# EAGLE board 77seg_panel (EAGLE 6.2)
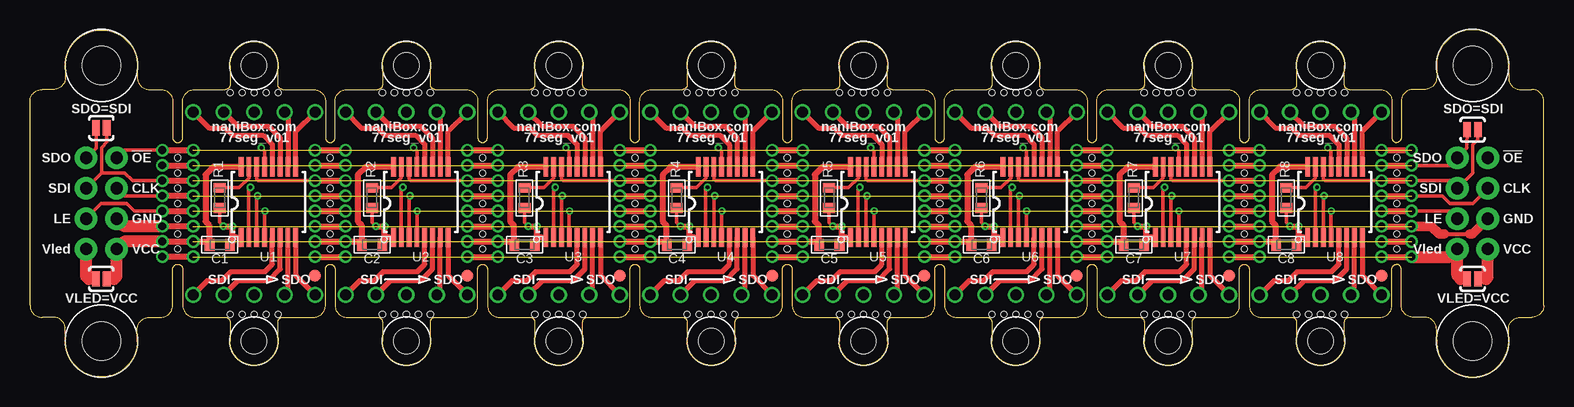
[diagram p0: board, top side]
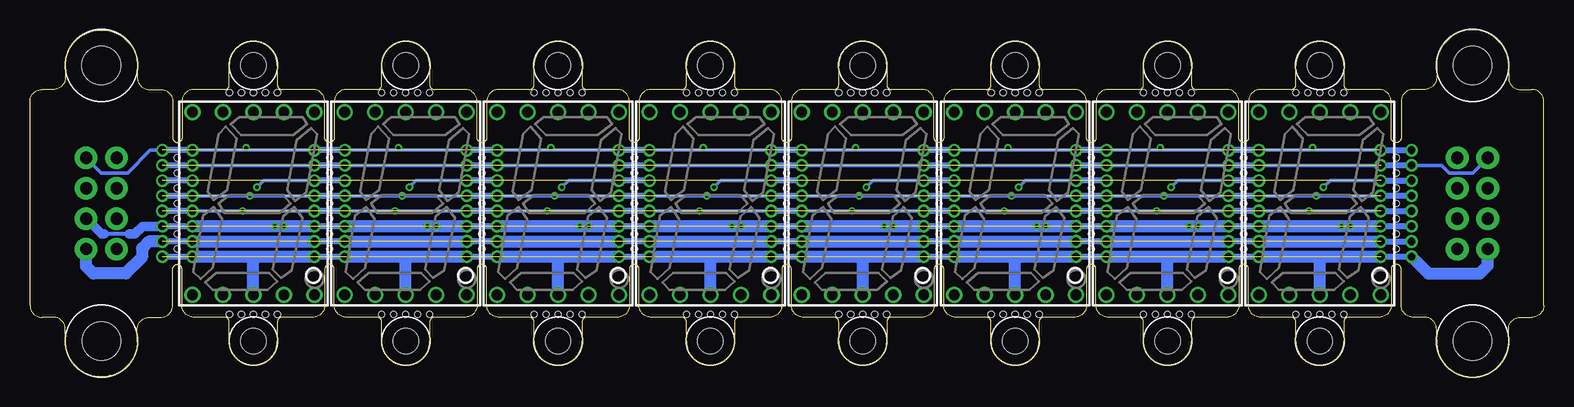
[diagram p1: board, bottom side, seen from below]

Size 126.2 x 28.95 mm. Coordinates in mm from the lower left corner, seen from the top.
Outline: 8.95,2.93 8.95,3.98 arc-90 9.95,4.98 10.9,4.98 arc90 11.9,5.98 11.9,9 arc-90 12.3,9.4
Outline: 2.95,3.08 2.95,3.98 arc90 1.95,4.98 1,4.98 arc-90 0,5.98 0,22.98 arc-90 1,23.98 1.95,23.98 arc90 2.95,24.98 2.95,26.03 arc-177 8.95,26.03 8.95,24.98 arc90 9.95,23.98 10.9,23.98 arc-90 11.9,22.98 11.9,19.96 arc90 12.3,19.55
Outline: 8.95,3.08 arc-180 2.95,2.93
Outline: 117.25,2.93 117.25,3.98 arc90 116.25,4.98 115.3,4.98 arc-90 114.3,5.98 114.3,9 arc90 113.9,9.4
Outline: 123.25,3.08 123.25,3.98 arc-90 124.25,4.98 125.2,4.98 arc90 126.2,5.98 126.2,22.98 arc90 125.2,23.98 124.25,23.98 arc-90 123.25,24.98 123.25,26.03 arc177 117.25,26.03 117.25,24.98 arc-90 116.25,23.98 115.3,23.98 arc90 114.3,22.98 114.3,19.96 arc-90 113.9,19.55
Outline: 117.25,3.08 arc180 123.25,2.93
Outline: 12.33,19.55 arc90 12.73,19.96 12.73,22.98 arc-90 13.73,23.98 16.28,23.98 arc90 16.68,24.38 16.68,25.98 arc-180 20.68,25.98 20.68,24.38 arc90 21.08,23.98 23.63,23.98 arc-90 24.63,22.98 24.63,19.96 arc90 25.03,19.55 arc90 25.43,19.96 25.43,22.98 arc-90 26.43,23.98 28.98,23.98 arc90 29.38,24.38 29.38,25.98 arc-180 33.38,25.98 33.38,24.38 arc90 33.78,23.98 36.33,23.98 arc-90 37.33,22.98 37.33,19.96 arc90 37.73,19.55 arc90 38.13,19.96 38.13,22.98 arc-90 39.13,23.98 41.68,23.98 arc90 42.08,24.38 42.08,25.98 arc-180 46.08,25.98 46.08,24.38 arc90 46.48,23.98 49.03,23.98 arc-90 50.03,22.98 50.03,19.96 arc90 50.43,19.55 arc90 50.83,19.96 50.83,22.98 arc-90 51.83,23.98 54.38,23.98 arc90 54.78,24.38 54.78,25.98 arc-180 58.78,25.98 58.78,24.38 arc90 59.18,23.98 61.73,23.98 arc-90 62.73,22.98 62.73,19.96 arc90 63.13,19.55 arc90 63.53,19.96 63.53,22.98 arc-90 64.53,23.98 67.08,23.98 arc90 67.48,24.38 67.48,25.98 arc-180 71.48,25.98 71.48,24.38 arc90 71.88,23.98 74.43,23.98 arc-90 75.43,22.98 75.43,19.96 arc90 75.83,19.55 arc90 76.23,19.96 76.23,22.98 arc-90 77.23,23.98 79.78,23.98 arc90 80.18,24.38 80.18,25.98 arc-180 84.18,25.98 84.18,24.38 arc90 84.58,23.98 87.13,23.98 arc-90 88.13,22.98 88.13,19.96 arc90 88.53,19.55 arc90 88.93,19.96 88.93,22.98 arc-90 89.93,23.98 92.48,23.98 arc90 92.88,24.38 92.88,25.98 arc-180 96.88,25.98 96.88,24.38 arc90 97.28,23.98 99.83,23.98 arc-90 100.83,22.98 100.83,19.96 arc90 101.23,19.55 arc90 101.63,19.96 101.63,22.98 arc-90 102.63,23.98 105.18,23.98 arc90 105.58,24.38 105.58,25.98 arc-180 109.58,25.98 109.58,24.38 arc90 109.98,23.98 112.53,23.98 arc-90 113.53,22.98 113.53,19.96 arc90 113.93,19.55
Outline: 12.33,9.4 arc-90 12.73,9 12.73,5.98 arc90 13.73,4.98 16.28,4.98 arc-90 16.68,4.58 16.68,2.98 arc180 20.68,2.98 20.68,4.58 arc-90 21.08,4.98 23.63,4.98 arc90 24.63,5.98 24.63,9 arc-90 25.03,9.4 arc-90 25.43,9 25.43,5.98 arc90 26.43,4.98 28.98,4.98 arc-90 29.38,4.58 29.38,2.98 arc180 33.38,2.98 33.38,4.58 arc-90 33.78,4.98 36.33,4.98 arc90 37.33,5.98 37.33,9 arc-90 37.73,9.4 arc-90 38.13,9 38.13,5.98 arc90 39.13,4.98 41.68,4.98 arc-90 42.08,4.58 42.08,2.98 arc180 46.08,2.98 46.08,4.58 arc-90 46.48,4.98 49.03,4.98 arc90 50.03,5.98 50.03,9 arc-90 50.43,9.4 arc-90 50.83,9 50.83,5.98 arc90 51.83,4.98 54.38,4.98 arc-90 54.78,4.58 54.78,2.98 arc180 58.78,2.98 58.78,4.58 arc-90 59.18,4.98 61.73,4.98 arc90 62.73,5.98 62.73,9 arc-90 63.13,9.4 arc-90 63.53,9 63.53,5.98 arc90 64.53,4.98 67.08,4.98 arc-90 67.48,4.58 67.48,2.98 arc180 71.48,2.98 71.48,4.58 arc-90 71.88,4.98 74.43,4.98 arc90 75.43,5.98 75.43,9 arc-90 75.83,9.4 arc-90 76.23,9 76.23,5.98 arc90 77.23,4.98 79.78,4.98 arc-90 80.18,4.58 80.18,2.98 arc180 84.18,2.98 84.18,4.58 arc-90 84.58,4.98 87.13,4.98 arc90 88.13,5.98 88.13,9 arc-90 88.53,9.4 arc-90 88.93,9 88.93,5.98 arc90 89.93,4.98 92.48,4.98 arc-90 92.88,4.58 92.88,2.98 arc180 96.88,2.98 96.88,4.58 arc-90 97.28,4.98 99.83,4.98 arc90 100.83,5.98 100.83,9 arc-90 101.23,9.4 arc-90 101.63,9 101.63,5.98 arc90 102.63,4.98 105.18,4.98 arc-90 105.58,4.58 105.58,2.98 arc180 109.58,2.98 109.58,4.58 arc-90 109.98,4.98 112.53,4.98 arc90 113.53,5.98 113.53,9 arc-90 113.93,9.4
Copper layers (1*16): Top 0.035mm / dielectric 1.5mm / Bottom 0.035mm
Design rules: minimum track width 0.15mm, minimum drill 0.3mm, track to track 0.15mm, track to pad 0.15mm, pad to pad 0.15mm, via to via 0.15mm, smd to smd 0mil, copper to edge 0.18mm, drill to drill 0.2mm, minimum pad ring 0.2mm, minimum via ring 0.15mm, stop-mask expansion 0.05mm, vias tented up to drill 2.5mm, thermal gap 0.25mm
Holes 0.5 mm at 12.3,15.75 12.3,17.02 12.3,18.29 12.3,14.48 12.3,13.21 12.3,11.94 12.3,10.67 18.68,23.73 19.68,23.73 20.68,23.73 17.68,23.73 16.68,23.73 18.68,5.23 17.68,5.23 16.68,5.23 19.68,5.23 20.68,5.23 25.03,15.75 25.03,17.02 25.03,18.29 25.03,14.48 25.03,13.21 25.03,11.94 25.03,10.67 31.38,23.73 32.38,23.73 33.38,23.73 30.38,23.73 29.38,23.73 31.38,5.23 30.38,5.23 29.38,5.23 32.38,5.23 33.38,5.23 37.73,15.75 37.73,17.02 37.73,18.29 37.73,14.48 37.73,13.21 37.73,11.94 37.73,10.67 44.08,23.73 45.08,23.73 46.08,23.73 43.08,23.73 42.08,23.73 44.08,5.23 43.08,5.23 42.08,5.23 45.08,5.23 46.08,5.23 50.43,15.75 50.43,17.02 50.43,18.29 50.43,14.48 50.43,13.21 50.43,11.94 50.43,10.67 56.78,23.73 57.78,23.73 58.78,23.73 55.78,23.73 54.78,23.73 56.78,5.23 55.78,5.23 54.78,5.23 57.78,5.23 58.78,5.23 63.13,15.75 63.13,17.02 63.13,18.29 63.13,14.48 63.13,13.21 63.13,11.94 63.13,10.67 69.48,23.73 70.48,23.73 71.48,23.73 68.48,23.73 67.48,23.73 69.48,5.23 68.48,5.23 67.48,5.23 70.48,5.23 71.48,5.23 75.83,15.75 75.83,17.02 75.83,18.29 75.83,14.48 75.83,13.21 75.83,11.94 75.83,10.67 82.18,23.73 83.18,23.73 84.18,23.73 81.18,23.73 80.18,23.73 82.18,5.23 81.18,5.23 80.18,5.23 83.18,5.23 84.18,5.23 88.53,15.75 88.53,17.02 88.53,18.29 88.53,14.48 88.53,13.21 88.53,11.94 88.53,10.67 94.88,23.73 95.88,23.73 96.88,23.73 93.88,23.73 92.88,23.73 94.88,5.23 93.88,5.23 92.88,5.23 95.88,5.23 96.88,5.23 101.23,15.75 101.23,17.02 101.23,18.29 101.23,14.48 101.23,13.21 101.23,11.94 101.23,10.67 107.58,23.73 108.58,23.73 109.58,23.73 106.58,23.73 105.58,23.73 107.58,5.23 106.58,5.23 105.58,5.23 108.58,5.23 109.58,5.23 113.93,15.75 113.93,17.02 113.93,18.29 113.93,14.48 113.93,13.21 113.93,11.94 113.93,10.67

## Footprints (pad centres in the part's own frame; a part is rotated, then mirrored left to right if it is on the bottom)
C0603 = smd 0.8 x 1: 1 -0.85,0; 2 0.85,0
1X08_1.27MM_NO1 = drill 0.65 pad 0.9: 1 0,0; 2 1.27,0; 3 2.54,0; 4 3.81,0; 5 5.08,0; 6 6.35,0; 7 7.62,0; 8 8.89,0
1X04_NO1 = drill 1.016 pad 1.88: 1 0,0; 2 2.54,0; 3 5.08,0; 4 7.62,0
FIDUCIAL_1X1.5 = smd 1 x 1: 1 0,0
R0603 = smd 0.8 x 1: 1 -0.85,0; 2 0.85,0
SJ_2S-NO = smd 0.635 x 1.27: 1 -0.45,0; 2 0.45,0
TSSOP16 = smd 0.4 x 1.6: 1 -2.275,-2.85; 2 -1.625,-2.85; 3 -0.975,-2.85; 4 -0.325,-2.85; 5 0.325,-2.85; 6 0.975,-2.85; 7 1.625,-2.85; 8 2.275,-2.85; 9 2.275,3.05; 10 1.625,3.05; 11 0.975,3.05; 12 0.325,3.05; 13 -0.325,3.05; 14 -0.975,3.05; 15 -1.625,3.05; 16 -2.275,3.05
SCREW_M3_REDUCED = hole 3.2: 0,0
7-SEGMENT-DISPLAY = drill 0.9 pad 1.35: 1 -5.08,-7.62; 2 -2.54,-7.62; 3 0,-7.62; 4 2.54,-7.62; 5 5.08,-7.62; 6 5.08,7.62; 7 2.54,7.62; 8 0,7.62; 9 -2.54,7.62; 10 -5.08,7.62
SCREW_M2_NOVIAS = hole 2.1: 0,0

## Placement (x,y rotation side)
C1  1uF  [C0603]  15.83,11.03 0 top
C2  1uF  [C0603]  28.53,11.03 0 top
C3  1uF  [C0603]  41.23,11.03 0 top
C4  1uF  [C0603]  53.93,11.03 0 top
C5  1uF  [C0603]  66.63,11.03 0 top
C6  1uF  [C0603]  79.33,11.03 0 top
C7  1uF  [C0603]  92.03,11.03 0 top
C8  1uF  [C0603]  104.73,11.03 0 top
CON1  [1X08_1.27MM_NO1]  11.03,18.92 270 top
CON2  [1X08_1.27MM_NO1]  115.17,18.92 270 top
CON3  M04NO1  [1X04_NO1]  121.52,18.29 270 top
CON4  M04NO1  [1X04_NO1]  118.98,18.29 270 top
CON5  M04NO1  [1X04_NO1]  7.22,18.29 270 top
CON6  M04NO1  [1X04_NO1]  4.68,18.29 270 top
CON7  [1X08_1.27MM_NO1]  23.76,18.92 270 top
CON8  [1X08_1.27MM_NO1]  13.6,18.92 270 top
CON9  [1X08_1.27MM_NO1]  36.46,18.92 270 top
CON10  [1X08_1.27MM_NO1]  26.3,18.92 270 top
CON11  [1X08_1.27MM_NO1]  49.16,18.92 270 top
CON12  [1X08_1.27MM_NO1]  39,18.92 270 top
CON13  [1X08_1.27MM_NO1]  61.86,18.92 270 top
CON14  [1X08_1.27MM_NO1]  51.7,18.92 270 top
CON15  [1X08_1.27MM_NO1]  74.56,18.92 270 top
CON16  [1X08_1.27MM_NO1]  64.4,18.92 270 top
CON17  [1X08_1.27MM_NO1]  87.26,18.92 270 top
CON18  [1X08_1.27MM_NO1]  77.1,18.92 270 top
CON19  [1X08_1.27MM_NO1]  99.96,18.92 270 top
CON20  [1X08_1.27MM_NO1]  89.8,18.92 270 top
CON21  [1X08_1.27MM_NO1]  112.66,18.92 270 top
CON22  [1X08_1.27MM_NO1]  102.5,18.92 270 top
JP1  FIDUCIAL1X1.5  [FIDUCIAL_1X1.5]  23.76,8.44 0 top
JP2  FIDUCIAL1X1.5  [FIDUCIAL_1X1.5]  36.46,8.44 0 top
JP3  FIDUCIAL1X1.5  [FIDUCIAL_1X1.5]  49.16,8.44 0 top
JP4  FIDUCIAL1X1.5  [FIDUCIAL_1X1.5]  61.86,8.44 0 top
JP5  FIDUCIAL1X1.5  [FIDUCIAL_1X1.5]  74.56,8.44 0 top
JP6  FIDUCIAL1X1.5  [FIDUCIAL_1X1.5]  87.26,8.44 0 top
JP7  FIDUCIAL1X1.5  [FIDUCIAL_1X1.5]  99.96,8.44 0 top
JP8  FIDUCIAL1X1.5  [FIDUCIAL_1X1.5]  112.66,8.44 0 top
R1  tbd  [R0603]  15.81,14.94 270 top
R2  tbd  [R0603]  28.51,14.94 270 top
R3  tbd  [R0603]  41.21,14.94 270 top
R4  tbd  [R0603]  53.91,14.94 270 top
R5  tbd  [R0603]  66.61,14.94 270 top
R6  tbd  [R0603]  79.31,14.94 270 top
R7  tbd  [R0603]  92.01,14.94 270 top
R8  tbd  [R0603]  104.71,14.94 270 top
SDI=SDO1  [SJ_2S-NO]  120.25,20.62 180 top
SDO=SDI  [SJ_2S-NO]  5.95,20.78 180 top
U1  TLC9516TSSOP  [TSSOP16]  19.88,14.48 0 top
U2  TLC9516TSSOP  [TSSOP16]  32.58,14.48 0 top
U3  TLC9516TSSOP  [TSSOP16]  45.28,14.48 0 top
U4  TLC9516TSSOP  [TSSOP16]  57.98,14.48 0 top
U5  TLC9516TSSOP  [TSSOP16]  70.68,14.48 0 top
U6  TLC9516TSSOP  [TSSOP16]  83.38,14.48 0 top
U7  TLC9516TSSOP  [TSSOP16]  96.08,14.48 0 top
U8  TLC9516TSSOP  [TSSOP16]  108.78,14.48 0 top
U$1  SCREW_NOGNDM3_REDUCED  [SCREW_M3_REDUCED]  5.95,2.98 0 top
U$2  SCREW_NOGNDM3_REDUCED  [SCREW_M3_REDUCED]  5.95,25.98 0 top
U$3  SCREW_NOGNDM3_REDUCED  [SCREW_M3_REDUCED]  120.25,2.98 0 top
U$4  SCREW_NOGNDM3_REDUCED  [SCREW_M3_REDUCED]  120.26,25.98 0 top
U$5  7-SEGMENT-DISPLAYPTH  [7-SEGMENT-DISPLAY]  18.68,14.48 0 bottom
U$6  SCREW_NOGND  [SCREW_M2_NOVIAS]  18.68,2.98 0 top
U$7  SCREW_NOGND  [SCREW_M2_NOVIAS]  18.68,25.98 0 top
U$8  7-SEGMENT-DISPLAYPTH  [7-SEGMENT-DISPLAY]  31.38,14.48 0 bottom
U$9  SCREW_NOGND  [SCREW_M2_NOVIAS]  31.38,2.98 0 top
U$10  SCREW_NOGND  [SCREW_M2_NOVIAS]  31.38,25.98 0 top
U$11  7-SEGMENT-DISPLAYPTH  [7-SEGMENT-DISPLAY]  44.08,14.48 0 bottom
U$12  SCREW_NOGND  [SCREW_M2_NOVIAS]  44.08,2.98 0 top
U$13  SCREW_NOGND  [SCREW_M2_NOVIAS]  44.08,25.98 0 top
U$14  7-SEGMENT-DISPLAYPTH  [7-SEGMENT-DISPLAY]  56.78,14.48 0 bottom
U$15  SCREW_NOGND  [SCREW_M2_NOVIAS]  56.78,2.98 0 top
U$16  SCREW_NOGND  [SCREW_M2_NOVIAS]  56.78,25.98 0 top
U$17  7-SEGMENT-DISPLAYPTH  [7-SEGMENT-DISPLAY]  69.48,14.48 0 bottom
U$18  SCREW_NOGND  [SCREW_M2_NOVIAS]  69.48,2.98 0 top
U$19  SCREW_NOGND  [SCREW_M2_NOVIAS]  69.48,25.98 0 top
U$20  7-SEGMENT-DISPLAYPTH  [7-SEGMENT-DISPLAY]  82.18,14.48 0 bottom
U$21  SCREW_NOGND  [SCREW_M2_NOVIAS]  82.18,2.98 0 top
U$22  SCREW_NOGND  [SCREW_M2_NOVIAS]  82.18,25.98 0 top
U$23  7-SEGMENT-DISPLAYPTH  [7-SEGMENT-DISPLAY]  94.88,14.48 0 bottom
U$24  SCREW_NOGND  [SCREW_M2_NOVIAS]  94.88,2.98 0 top
U$25  SCREW_NOGND  [SCREW_M2_NOVIAS]  94.88,25.98 0 top
U$26  7-SEGMENT-DISPLAYPTH  [7-SEGMENT-DISPLAY]  107.58,14.48 0 bottom
U$27  SCREW_NOGND  [SCREW_M2_NOVIAS]  107.58,2.98 0 top
U$28  SCREW_NOGND  [SCREW_M2_NOVIAS]  107.58,25.98 0 top
VLED=VCC  [SJ_2S-NO]  5.95,8.18 180 top
VLED=VCC1  [SJ_2S-NO]  120.25,8.18 180 top

## Library data of the parts
C1-C8 R1-R8 = nanibox_rcl
CON1-CON22 = nanibox_con
JP1-JP8 U1-U8 U$1-U$28 = nanibox
SDI=SDO1 SDO=SDI VLED=VCC VLED=VCC1 = SparkFun

## Nets
!OE: CON1.1 CON2.1 CON3.1 CON5.1
!OE1: CON7.1 CON8.1 U1.13
!OE2: CON9.1 CON10.1 U2.13
!OE3: CON11.1 CON12.1 U3.13
!OE4: CON13.1 CON14.1 U4.13
!OE5: CON15.1 CON16.1 U5.13
!OE6: CON17.1 CON18.1 U6.13
!OE7: CON19.1 CON20.1 U7.13
!OE8: CON21.1 CON22.1 U8.13
CLK: CON1.4 CON2.4 CON3.2 CON5.2
CLK1: CON7.4 CON8.4 U1.3
CLK2: CON9.4 CON10.4 U2.3
CLK3: CON11.4 CON12.4 U3.3
CLK4: CON13.4 CON14.4 U4.3
CLK5: CON15.4 CON16.4 U5.3
CLK6: CON17.4 CON18.4 U6.3
CLK7: CON19.4 CON20.4 U7.3
CLK8: CON21.4 CON22.4 U8.3
GND: CON1.6 CON2.6 CON3.3 CON5.3
GND1: C1.2 CON7.6 CON8.6 R1.2 U1.1
GND2: C2.2 CON9.6 CON10.6 R2.2 U2.1
GND3: C3.2 CON11.6 CON12.6 R3.2 U3.1
GND4: C4.2 CON13.6 CON14.6 R4.2 U4.1
GND5: C5.2 CON15.6 CON16.6 R5.2 U5.1
GND6: C6.2 CON17.6 CON18.6 R6.2 U6.1
GND7: C7.2 CON19.6 CON20.6 R7.2 U7.1
GND8: C8.2 CON21.6 CON22.6 R8.2 U8.1
LE: CON1.5 CON2.5 CON4.3 CON6.3
LE1: CON7.5 CON8.5 U1.4
LE2: CON9.5 CON10.5 U2.4
LE3: CON11.5 CON12.5 U3.4
LE4: CON13.5 CON14.5 U4.4
LE5: CON15.5 CON16.5 U5.4
LE6: CON17.5 CON18.5 U6.4
LE7: CON19.5 CON20.5 U7.4
LE8: CON21.5 CON22.5 U8.4
N$1: U2.10 U$8.9
N$2: U2.9 U$8.10
N$3: U1.10 U$5.9
N$4: U1.9 U$5.10
N$5: U2.11 U$8.7
N$6: U2.12 U$8.6
N$7: U2.6 U$8.4
N$8: U2.7 U$8.2
N$9: U2.8 U$8.1
N$10: U1.11 U$5.7
N$11: U1.12 U$5.6
N$12: U1.6 U$5.4
N$13: U1.7 U$5.2
N$14: U1.8 U$5.1
N$15: U2.5 U$8.5
N$16: U3.10 U$11.9
N$17: U1.5 U$5.5
N$18: U3.9 U$11.10
N$19: U3.11 U$11.7
N$20: U3.12 U$11.6
N$21: U3.6 U$11.4
N$22: U3.7 U$11.2
N$23: U3.8 U$11.1
N$24: U3.5 U$11.5
N$25: U4.10 U$14.9
N$26: U4.9 U$14.10
N$27: U4.11 U$14.7
N$28: U4.12 U$14.6
N$29: U4.6 U$14.4
N$30: U4.7 U$14.2
N$31: U4.8 U$14.1
N$32: U4.5 U$14.5
N$33: U5.10 U$17.9
N$34: U5.9 U$17.10
N$35: U5.11 U$17.7
N$36: U5.12 U$17.6
N$37: U5.6 U$17.4
N$38: U5.7 U$17.2
N$39: U5.8 U$17.1
N$40: U5.5 U$17.5
N$41: U6.10 U$20.9
N$42: U6.9 U$20.10
N$43: U6.11 U$20.7
N$44: U6.12 U$20.6
N$45: U6.6 U$20.4
N$46: U6.7 U$20.2
N$47: U6.8 U$20.1
N$48: U6.5 U$20.5
N$49: U7.10 U$23.9
N$50: U7.9 U$23.10
N$51: U7.11 U$23.7
N$52: U7.12 U$23.6
N$53: U7.6 U$23.4
N$54: U7.7 U$23.2
N$55: U7.8 U$23.1
N$56: U7.5 U$23.5
N$57: U8.10 U$26.9
N$58: U8.9 U$26.10
N$59: U8.11 U$26.7
N$60: U8.12 U$26.6
N$61: U8.6 U$26.4
N$62: U8.7 U$26.2
N$63: U8.8 U$26.1
N$64: U8.5 U$26.5
REXT: R1.1 U1.15
REXT1: R2.1 U2.15
REXT2: R3.1 U3.15
REXT3: R4.1 U4.15
REXT4: R5.1 U5.15
REXT5: R6.1 U6.15
REXT6: R7.1 U7.15
REXT7: R8.1 U8.15
SDI: CON1.3 CON2.3 CON4.2 CON6.2 SDI=SDO1.1 SDO=SDI.1
SDI1: CON8.3 U1.2
SDI2: CON10.3 U2.2
SDI3: CON12.3 U3.2
SDI4: CON14.3 U4.2
SDI5: CON16.3 U5.2
SDI6: CON18.3 U6.2
SDI7: CON20.3 U7.2
SDI8: CON22.3 U8.2
SDO: CON1.2 CON2.2 CON4.1 CON6.1 SDI=SDO1.2 SDO=SDI.2
SDO1: CON7.3 U1.14
SDO2: CON9.3 U2.14
SDO3: CON11.3 U3.14
SDO4: CON13.3 U4.14
SDO5: CON15.3 U5.14
SDO6: CON17.3 U6.14
SDO7: CON19.3 U7.14
SDO8: CON21.3 U8.14
SDRET: CON7.2 CON8.2
SDRET1: CON9.2 CON10.2
SDRET2: CON11.2 CON12.2
SDRET3: CON13.2 CON14.2
SDRET4: CON15.2 CON16.2
SDRET5: CON17.2 CON18.2
SDRET6: CON19.2 CON20.2
SDRET7: CON21.2 CON22.2
VCC: CON1.7 CON2.7 CON3.4 CON5.4 VLED=VCC1.1 VLED=VCC.1
VCC1: C1.1 CON7.7 CON8.7 U1.16
VCC2: C2.1 CON9.7 CON10.7 U2.16
VCC3: C3.1 CON11.7 CON12.7 U3.16
VCC4: C4.1 CON13.7 CON14.7 U4.16
VCC5: C5.1 CON15.7 CON16.7 U5.16
VCC6: C6.1 CON17.7 CON18.7 U6.16
VCC7: C7.1 CON19.7 CON20.7 U7.16
VCC8: C8.1 CON21.7 CON22.7 U8.16
VLED: CON1.8 CON2.8 CON4.4 CON6.4 VLED=VCC1.2 VLED=VCC.2
VLED1: CON7.8 CON8.8 U$5.3
VLED2: CON9.8 CON10.8 U$8.3
VLED3: CON11.8 CON12.8 U$11.3
VLED4: CON13.8 CON14.8 U$14.3
VLED5: CON15.8 CON16.8 U$17.3
VLED6: CON17.8 CON18.8 U$20.3
VLED7: CON19.8 CON20.8 U$23.3
VLED8: CON21.8 CON22.8 U$26.3

## Tracks (layer width: path | path; a pad name or v marks a point on that pad's centre or on a via)
!OE  (1 unrouted)
  Top 0.3: CON1.1 7.86,18.92 CON5.1
  Top 0.5: CON1.1 13.57,18.92
  Bottom 0.3: CON2.1 116.17,18.92 118.06,17.03 120.26,17.03 CON3.1
  Bottom 0.5: 13.57,18.92 CON1.1
!OE1  (via drill 0.3)
  Top 0.3: U1.13 19.55,18.85 v19.28,19.12
  Top 0.5: CON7.1 26.3,18.92
  Bottom 0.3: CON8.1 19.28,18.92 | 19.28,18.92 CON7.1 | v19.28,19.12 19.28,18.92
  Bottom 0.5: CON7.1 26.3,18.92
!OE2  (via drill 0.3)
  Top 0.3: U2.13 32.25,18.85 v31.98,19.12
  Top 0.5: CON9.1 39,18.92
  Bottom 0.3: CON10.1 31.98,18.92 | 31.98,18.92 CON9.1 | v31.98,19.12 31.98,18.92
  Bottom 0.5: CON9.1 39,18.92
!OE3  (via drill 0.3)
  Top 0.3: U3.13 44.95,18.85 v44.68,19.12
  Top 0.5: CON11.1 51.7,18.92
  Bottom 0.3: CON12.1 44.68,18.92 | 44.68,18.92 CON11.1 | v44.68,19.12 44.68,18.92
  Bottom 0.5: CON11.1 51.7,18.92
!OE4  (via drill 0.3)
  Top 0.3: U4.13 57.66,18.85 v57.38,19.12
  Top 0.5: CON13.1 64.4,18.92
  Bottom 0.3: CON14.1 57.38,18.92 | 57.38,18.92 CON13.1 | v57.38,19.12 57.38,18.92
  Bottom 0.5: CON13.1 64.4,18.92
!OE5  (via drill 0.3)
  Top 0.3: U5.13 70.36,18.85 v70.08,19.12
  Top 0.5: CON15.1 77.1,18.92
  Bottom 0.3: CON16.1 70.08,18.92 | 70.08,18.92 CON15.1 | v70.08,19.12 70.08,18.92
  Bottom 0.5: CON15.1 77.1,18.92
!OE6  (via drill 0.3)
  Top 0.3: U6.13 83.06,18.85 v82.78,19.12
  Top 0.5: CON17.1 89.8,18.92
  Bottom 0.3: CON18.1 82.78,18.92 | 82.78,18.92 CON17.1 | v82.78,19.12 82.78,18.92
  Bottom 0.5: CON17.1 89.8,18.92
!OE7  (via drill 0.3)
  Top 0.3: U7.13 95.76,18.85 v95.48,19.12
  Top 0.5: CON19.1 102.5,18.92
  Bottom 0.3: CON20.1 95.48,18.92 | 95.48,18.92 CON19.1 | v95.48,19.12 95.48,18.92
  Bottom 0.5: CON19.1 102.5,18.92
!OE8  (via drill 0.3)
  Top 0.3: U8.13 108.45,18.85 v108.18,19.12
  Top 0.5: CON21.1 115.2,18.92
  Bottom 0.3: CON22.1 108.18,18.92 | 108.18,18.92 CON21.1 | v108.18,19.12 108.18,18.92
  Bottom 0.5: CON21.1 115.2,18.92
CLK  (1 unrouted)
  Top 0.3: CON1.4 7.86,15.11 CON5.2 | CON2.4 117.73,15.11 118.36,14.48 120.25,14.48 CON3.2
  Top 0.5: 13.57,15.11 CON1.4
  Bottom 0.5: CON1.4 13.57,15.11
CLK1  (via drill 0.3)
  Top 0.3: U1.3 18.91,15.04 v18.98,15.11
  Top 0.5: CON7.4 26.3,15.11
  Bottom 0.3: CON7.4 v18.98,15.11 CON8.4
  Bottom 0.5: CON7.4 26.3,15.11
CLK2  (via drill 0.3)
  Top 0.3: U2.3 31.61,15.04 v31.68,15.11
  Top 0.5: CON9.4 39,15.11
  Bottom 0.3: CON9.4 v31.68,15.11 CON10.4
  Bottom 0.5: CON9.4 39,15.11
CLK3  (via drill 0.3)
  Top 0.3: U3.3 44.31,15.04 v44.38,15.11
  Top 0.5: CON11.4 51.7,15.11
  Bottom 0.3: CON11.4 v44.38,15.11 CON12.4
  Bottom 0.5: CON11.4 51.7,15.11
CLK4  (via drill 0.3)
  Top 0.3: U4.3 57,15.04 v57.08,15.11
  Top 0.5: CON13.4 64.4,15.11
  Bottom 0.3: CON13.4 v57.08,15.11 CON14.4
  Bottom 0.5: CON13.4 64.4,15.11
CLK5  (via drill 0.3)
  Top 0.3: U5.3 69.7,15.04 v69.78,15.11
  Top 0.5: CON15.4 77.1,15.11
  Bottom 0.3: CON15.4 v69.78,15.11 CON16.4
  Bottom 0.5: CON15.4 77.1,15.11
CLK6  (via drill 0.3)
  Top 0.3: U6.3 82.41,15.04 v82.48,15.11
  Top 0.5: CON17.4 89.8,15.11
  Bottom 0.3: CON17.4 v82.48,15.11 CON18.4
  Bottom 0.5: CON17.4 89.8,15.11
CLK7  (via drill 0.3)
  Top 0.3: U7.3 95.11,15.04 v95.18,15.11
  Top 0.5: CON19.4 102.5,15.11
  Bottom 0.3: CON19.4 v95.18,15.11 CON20.4
  Bottom 0.5: CON19.4 102.5,15.11
CLK8  (via drill 0.3)
  Top 0.3: U8.3 107.81,15.04 v107.88,15.11
  Top 0.5: CON21.4 115.2,15.11
  Bottom 0.3: CON21.4 v107.88,15.11 CON22.4
  Bottom 0.5: CON21.4 115.2,15.11
GND  (1 unrouted)
  Top 0.32: 117.91,11.93 120.01,11.93
  Top 0.5: 13.57,12.57 CON1.6
  Top 0.8: CON2.6 116.81,12.57 117.46,11.93 117.91,11.93 | 120.01,11.93 120.24,11.93 CON3.3
  Top 1: CON1.6 7.86,12.57 CON5.3
  Bottom 0.33: 117.91,11.93 120.01,11.93
  Bottom 0.5: CON1.6 13.57,12.57
  Bottom 0.8: CON3.3 120.24,11.93 120.01,11.93 | CON2.6 116.81,12.57 117.46,11.93 117.91,11.93
GND1  (via drill 0.3)
  Top 0.3: v16.13,12.57 15.81,12.89 R1.2
  Top 0.4: U1.1 17.28,11.63
  Top 0.5: v16.13,12.57 v16.88,12.57 16.88,11.63 | C1.2 16.88,11.23 16.88,11.63 | 17.28,11.63 16.88,11.63 | CON7.6 26.3,12.57
  Bottom 0.5: CON7.6 26.3,12.57
  Bottom 1: CON8.6 v16.88,12.57 CON7.6
GND2  (via drill 0.3)
  Top 0.3: v28.83,12.57 28.51,12.89 R2.2
  Top 0.4: U2.1 29.98,11.63
  Top 0.5: v28.83,12.57 v29.58,12.57 29.58,11.63 | C2.2 29.58,11.23 29.58,11.63 | 29.98,11.63 29.58,11.63 | CON9.6 39,12.57
  Bottom 0.5: CON9.6 39,12.57
  Bottom 1: CON10.6 v29.58,12.57 CON9.6
GND3  (via drill 0.3)
  Top 0.3: v41.53,12.57 41.21,12.89 R3.2
  Top 0.4: U3.1 42.68,11.63
  Top 0.5: v41.53,12.57 v42.28,12.57 42.28,11.63 | C3.2 42.28,11.23 42.28,11.63 | 42.68,11.63 42.28,11.63 | CON11.6 51.7,12.57
  Bottom 0.5: CON11.6 51.7,12.57
  Bottom 1: CON12.6 v42.28,12.57 CON11.6
GND4  (via drill 0.3)
  Top 0.3: v54.23,12.57 53.91,12.89 R4.2
  Top 0.4: U4.1 55.38,11.63
  Top 0.5: v54.23,12.57 v54.98,12.57 54.98,11.63 | C4.2 54.98,11.23 54.98,11.63 | 55.38,11.63 54.98,11.63 | CON13.6 64.4,12.57
  Bottom 0.5: CON13.6 64.4,12.57
  Bottom 1: CON14.6 v54.98,12.57 CON13.6
GND5  (via drill 0.3)
  Top 0.3: v66.93,12.57 66.61,12.89 R5.2
  Top 0.4: U5.1 68.08,11.63
  Top 0.5: v66.93,12.57 v67.68,12.57 67.68,11.63 | C5.2 67.68,11.23 67.68,11.63 | 68.08,11.63 67.68,11.63 | CON15.6 77.1,12.57
  Bottom 0.5: CON15.6 77.1,12.57
  Bottom 1: CON16.6 v67.68,12.57 CON15.6
GND6  (via drill 0.3)
  Top 0.3: v79.63,12.57 79.31,12.89 R6.2
  Top 0.4: U6.1 80.78,11.63
  Top 0.5: v79.63,12.57 v80.38,12.57 80.38,11.63 | C6.2 80.38,11.23 80.38,11.63 | 80.78,11.63 80.38,11.63 | CON17.6 89.8,12.57
  Bottom 0.5: CON17.6 89.8,12.57
  Bottom 1: CON18.6 v80.38,12.57 CON17.6
GND7  (via drill 0.3)
  Top 0.3: v92.33,12.57 92.01,12.89 R7.2
  Top 0.4: U7.1 93.48,11.63
  Top 0.5: v92.33,12.57 v93.08,12.57 93.08,11.63 | C7.2 93.08,11.23 93.08,11.63 | 93.48,11.63 93.08,11.63 | CON19.6 102.5,12.57
  Bottom 0.5: CON19.6 102.5,12.57
  Bottom 1: CON20.6 v93.08,12.57 CON19.6
GND8  (via drill 0.3)
  Top 0.3: v105.03,12.57 104.71,12.89 R8.2
  Top 0.4: U8.1 106.18,11.63
  Top 0.5: v105.03,12.57 v105.78,12.57 105.78,11.63 | C8.2 105.78,11.23 105.78,11.63 | 106.18,11.63 105.78,11.63 | CON21.6 115.2,12.57
  Bottom 0.5: CON21.6 115.2,12.57
  Bottom 1: CON22.6 v105.78,12.57 CON21.6
LE  (1 unrouted)
  Top 0.3: CON1.5 8.69,13.84 8.05,14.48 5.95,14.48 CON6.3 | CON2.5 118.34,13.84 CON4.3
  Top 0.5: CON1.5 13.57,13.84
  Bottom 0.5: 13.57,13.84 CON1.5
LE1  (via drill 0.3)
  Top 0.3: U1.4 19.55,13.82 v19.58,13.84
  Top 0.5: CON7.5 26.3,13.84
  Bottom 0.3: CON8.5 v19.58,13.84 CON7.5
  Bottom 0.5: CON7.5 26.3,13.84
LE2  (via drill 0.3)
  Top 0.3: U2.4 32.25,13.82 v32.28,13.84
  Top 0.5: CON9.5 39,13.84
  Bottom 0.3: CON10.5 v32.28,13.84 CON9.5
  Bottom 0.5: CON9.5 39,13.84
LE3  (via drill 0.3)
  Top 0.3: U3.4 44.95,13.82 v44.98,13.84
  Top 0.5: CON11.5 51.7,13.84
  Bottom 0.3: CON12.5 v44.98,13.84 CON11.5
  Bottom 0.5: CON11.5 51.7,13.84
LE4  (via drill 0.3)
  Top 0.3: U4.4 57.66,13.82 v57.68,13.84
  Top 0.5: CON13.5 64.4,13.84
  Bottom 0.3: CON14.5 v57.68,13.84 CON13.5
  Bottom 0.5: CON13.5 64.4,13.84
LE5  (via drill 0.3)
  Top 0.3: U5.4 70.36,13.82 v70.38,13.84
  Top 0.5: CON15.5 77.1,13.84
  Bottom 0.3: CON16.5 v70.38,13.84 CON15.5
  Bottom 0.5: CON15.5 77.1,13.84
LE6  (via drill 0.3)
  Top 0.3: U6.4 83.06,13.82 v83.08,13.84
  Top 0.5: CON17.5 89.8,13.84
  Bottom 0.3: CON18.5 v83.08,13.84 CON17.5
  Bottom 0.5: CON17.5 89.8,13.84
LE7  (via drill 0.3)
  Top 0.3: U7.4 95.76,13.82 v95.78,13.84
  Top 0.5: CON19.5 102.5,13.84
  Bottom 0.3: CON20.5 v95.78,13.84 CON19.5
  Bottom 0.5: CON19.5 102.5,13.84
LE8  (via drill 0.3)
  Top 0.3: U8.4 108.45,13.82 v108.48,13.84
  Top 0.5: CON21.5 115.2,13.84
  Bottom 0.3: CON22.5 v108.48,13.84 CON21.5
  Bottom 0.5: CON21.5 115.2,13.84
N$1
  Top 0.4: U$8.9 34.2,21.81 U2.10
N$2
  Top 0.4: U2.9 34.86,20.49 U$8.10
N$3
  Top 0.4: U$5.9 21.51,21.81 U1.10
N$4
  Top 0.4: U1.9 22.16,20.49 U$5.10
N$5
  Top 0.4: U$8.7 30.01,20.93 32.58,20.93 33.55,19.95 U2.11
N$6
  Top 0.4: U$8.6 27.62,20.78 28.98,20.78 29.58,20.18 32.13,20.18 32.91,19.4 U2.12
N$7
  Top 0.4: U$8.4 30.01,8.03 32.58,8.03 33.55,9 U2.6
N$8
  Top 0.4: U$8.2 34.2,7.14 U2.7
N$9
  Top 0.4: U2.8 34.86,8.46 U$8.1
N$10
  Top 0.4: U$5.7 17.31,20.93 19.88,20.93 20.86,19.95 U1.11
N$11
  Top 0.4: U$5.6 14.92,20.78 16.28,20.78 16.88,20.18 19.43,20.18 20.2,19.4 U1.12
N$12
  Top 0.4: U$5.4 17.31,8.03 19.88,8.03 20.86,9 U1.6
N$13
  Top 0.4: U$5.2 21.51,7.14 U1.7
N$14
  Top 0.4: U1.8 22.16,8.46 U$5.1
N$15
  Top 0.4: U$8.5 27.47,8.03 28.68,8.03 29.43,8.78 32.28,8.78 32.91,9.4 U2.5
N$16
  Top 0.4: U$11.9 46.91,21.81 U3.10
N$17
  Top 0.4: U$5.5 14.77,8.03 15.98,8.03 16.73,8.78 19.58,8.78 20.2,9.4 U1.5
N$18
  Top 0.4: U3.9 47.56,20.49 U$11.10
N$19
  Top 0.4: U$11.7 42.71,20.93 45.28,20.93 46.25,19.95 U3.11
N$20
  Top 0.4: U$11.6 40.32,20.78 41.68,20.78 42.28,20.18 44.83,20.18 45.61,19.4 U3.12
N$21
  Top 0.4: U$11.4 42.71,8.03 45.28,8.03 46.25,9 U3.6
N$22
  Top 0.4: U$11.2 46.91,7.14 U3.7
N$23
  Top 0.4: U3.8 47.56,8.46 U$11.1
N$24
  Top 0.4: U$11.5 40.17,8.03 41.38,8.03 42.13,8.78 44.98,8.78 45.61,9.4 U3.5
N$25
  Top 0.4: U$14.9 59.61,21.81 U4.10
N$26
  Top 0.4: U4.9 60.25,20.49 U$14.10
N$27
  Top 0.4: U$14.7 55.41,20.93 57.98,20.93 58.95,19.95 U4.11
N$28
  Top 0.4: U$14.6 53.02,20.78 54.38,20.78 54.98,20.18 57.53,20.18 58.31,19.4 U4.12
N$29
  Top 0.4: U$14.4 55.41,8.03 57.98,8.03 58.95,9 U4.6
N$30
  Top 0.4: U$14.2 59.61,7.14 U4.7
N$31
  Top 0.4: U4.8 60.25,8.46 U$14.1
N$32
  Top 0.4: U$14.5 52.87,8.03 54.08,8.03 54.83,8.78 57.68,8.78 58.31,9.4 U4.5
N$33
  Top 0.4: U$17.9 72.31,21.81 U5.10
N$34
  Top 0.4: U5.9 72.95,20.49 U$17.10
N$35
  Top 0.4: U$17.7 68.11,20.93 70.68,20.93 71.66,19.95 U5.11
N$36
  Top 0.4: U$17.6 65.72,20.78 67.08,20.78 67.68,20.18 70.23,20.18 71.01,19.4 U5.12
N$37
  Top 0.4: U$17.4 68.11,8.03 70.68,8.03 71.66,9 U5.6
N$38
  Top 0.4: U$17.2 72.31,7.14 U5.7
N$39
  Top 0.4: U5.8 72.95,8.46 U$17.1
N$40
  Top 0.4: U$17.5 65.57,8.03 66.78,8.03 67.53,8.78 70.38,8.78 71.01,9.4 U5.5
N$41
  Top 0.4: U$20.9 85.01,21.81 U6.10
N$42
  Top 0.4: U6.9 85.66,20.49 U$20.10
N$43
  Top 0.4: U$20.7 80.81,20.93 83.38,20.93 84.36,19.95 U6.11
N$44
  Top 0.4: U$20.6 78.42,20.78 79.78,20.78 80.38,20.18 82.93,20.18 83.7,19.4 U6.12
N$45
  Top 0.4: U$20.4 80.81,8.03 83.38,8.03 84.36,9 U6.6
N$46
  Top 0.4: U$20.2 85.01,7.14 U6.7
N$47
  Top 0.4: U6.8 85.66,8.46 U$20.1
N$48
  Top 0.4: U$20.5 78.27,8.03 79.48,8.03 80.23,8.78 83.08,8.78 83.7,9.4 U6.5
N$49
  Top 0.4: U$23.9 97.7,21.81 U7.10
N$50
  Top 0.4: U7.9 98.36,20.49 U$23.10
N$51
  Top 0.4: U$23.7 93.51,20.93 96.08,20.93 97.06,19.95 U7.11
N$52
  Top 0.4: U$23.6 91.12,20.78 92.48,20.78 93.08,20.18 95.63,20.18 96.41,19.4 U7.12
N$53
  Top 0.4: U$23.4 93.51,8.03 96.08,8.03 97.06,9 U7.6
N$54
  Top 0.4: U$23.2 97.7,7.14 U7.7
N$55
  Top 0.4: U7.8 98.36,8.46 U$23.1
N$56
  Top 0.4: U$23.5 90.97,8.03 92.18,8.03 92.93,8.78 95.78,8.78 96.41,9.4 U7.5
N$57
  Top 0.4: U$26.9 110.41,21.81 U8.10
N$58
  Top 0.4: U8.9 111.06,20.49 U$26.10
N$59
  Top 0.4: U$26.7 106.21,20.93 108.78,20.93 109.76,19.95 U8.11
N$60
  Top 0.4: U$26.6 103.82,20.78 105.18,20.78 105.78,20.18 108.33,20.18 109.11,19.4 U8.12
N$61
  Top 0.4: U$26.4 106.21,8.03 108.78,8.03 109.76,9 U8.6
N$62
  Top 0.4: U$26.2 110.41,7.14 U8.7
N$63
  Top 0.4: U8.8 111.06,8.46 U$26.1
N$64
  Top 0.4: U$26.5 103.67,8.03 104.88,8.03 105.63,8.78 108.48,8.78 109.11,9.4 U8.5
REXT
  Top 0.3: R1.1 17.45,15.79 18.26,16.6 U1.15
REXT1
  Top 0.3: R2.1 30.14,15.79 30.96,16.6 U2.15
REXT2
  Top 0.3: R3.1 42.84,15.79 43.66,16.6 U3.15
REXT3
  Top 0.3: R4.1 55.55,15.79 56.36,16.6 U4.15
REXT4
  Top 0.3: R5.1 68.25,15.79 69.06,16.6 U5.15
REXT5
  Top 0.3: R6.1 80.95,15.79 81.76,16.6 U6.15
REXT6
  Top 0.3: R7.1 93.65,15.79 94.45,16.6 U7.15
REXT7
  Top 0.3: R8.1 106.34,15.79 107.16,16.6 U8.15
SDI  (1 unrouted)
  Top 0.3: CON1.3 8.54,16.38 7.9,17.03 5.96,17.03 | 5.96,17.03 CON6.2 | SDO=SDI.1 6.4,19.58 5.96,19.14 5.96,17.03 | CON2.3 118.34,16.38 CON4.2 120.26,17.03 120.26,19.38 120.7,19.82 SDI=SDO1.1
  Top 0.5: CON1.3 13.57,16.38
  Bottom 0.5: 13.57,16.38 CON1.3
SDI1  (via drill 0.3)
  Top 0.3: U1.2 18.23,11.65 18.23,15.68 v18.38,15.83
  Bottom 0.3: CON8.3 17.83,16.38 v18.38,15.83
SDI2  (via drill 0.3)
  Top 0.3: U2.2 30.93,11.65 30.93,15.68 v31.08,15.83
  Bottom 0.3: CON10.3 30.53,16.38 v31.08,15.83
SDI3  (via drill 0.3)
  Top 0.3: U3.2 43.63,11.65 43.63,15.68 v43.78,15.83
  Bottom 0.3: CON12.3 43.22,16.38 v43.78,15.83
SDI4  (via drill 0.3)
  Top 0.3: U4.2 56.33,11.65 56.33,15.68 v56.48,15.83
  Bottom 0.3: CON14.3 55.92,16.38 v56.48,15.83
SDI5  (via drill 0.3)
  Top 0.3: U5.2 69.03,11.65 69.03,15.68 v69.18,15.83
  Bottom 0.3: CON16.3 68.62,16.38 v69.18,15.83
SDI6  (via drill 0.3)
  Top 0.3: U6.2 81.73,11.65 81.73,15.68 v81.88,15.83
  Bottom 0.3: CON18.3 81.33,16.38 v81.88,15.83
SDI7  (via drill 0.3)
  Top 0.3: U7.2 94.43,11.65 94.43,15.68 v94.58,15.83
  Bottom 0.3: CON20.3 94.03,16.38 v94.58,15.83
SDI8  (via drill 0.3)
  Top 0.3: U8.2 107.13,11.65 107.13,15.68 v107.28,15.83
  Bottom 0.3: CON22.3 106.73,16.38 v107.28,15.83
SDO  (1 unrouted)
  Top 0.3: CON6.1 5.5,19.11 SDO=SDI.2 | CON2.2 118.34,17.65 CON4.1 119.77,19.08 SDI=SDO1.2
  Top 0.5: CON1.2 13.57,17.65
  Bottom 0.3: CON1.2 8.53,17.65 7.9,17.03 5.94,17.03 CON6.1
  Bottom 0.5: CON1.2 13.57,17.65
SDO1
  Top 0.3: CON7.3 19.02,16.38 18.91,16.5 U1.14
  Top 0.5: CON7.3 26.3,16.38
  Bottom 0.5: CON7.3 26.3,16.38
SDO2
  Top 0.3: CON9.3 31.73,16.38 31.61,16.5 U2.14
  Top 0.5: CON9.3 39,16.38
  Bottom 0.5: CON9.3 39,16.38
SDO3
  Top 0.3: CON11.3 44.42,16.38 44.31,16.5 U3.14
  Top 0.5: CON11.3 51.7,16.38
  Bottom 0.5: CON11.3 51.7,16.38
SDO4
  Top 0.3: CON13.3 57.12,16.38 57,16.5 U4.14
  Top 0.5: CON13.3 64.4,16.38
  Bottom 0.5: CON13.3 64.4,16.38
SDO5
  Top 0.3: CON15.3 69.83,16.38 69.7,16.5 U5.14
  Top 0.5: CON15.3 77.1,16.38
  Bottom 0.5: CON15.3 77.1,16.38
SDO6
  Top 0.3: CON17.3 82.53,16.38 82.41,16.5 U6.14
  Top 0.5: CON17.3 89.8,16.38
  Bottom 0.5: CON17.3 89.8,16.38
SDO7
  Top 0.3: CON19.3 95.23,16.38 95.11,16.5 U7.14
  Top 0.5: CON19.3 102.5,16.38
  Bottom 0.5: CON19.3 102.5,16.38
SDO8
  Top 0.3: CON21.3 107.92,16.38 107.81,16.5 U8.14
  Top 0.5: CON21.3 115.2,16.38
  Bottom 0.5: CON21.3 115.2,16.38
SDRET
  Top 0.5: CON7.2 26.3,17.65
  Bottom 0.3: CON8.2 CON7.2
  Bottom 0.5: CON7.2 26.3,17.65
SDRET1
  Top 0.5: CON9.2 39,17.65
  Bottom 0.3: CON10.2 CON9.2
  Bottom 0.5: CON9.2 39,17.65
SDRET2
  Top 0.5: CON11.2 51.7,17.65
  Bottom 0.3: CON12.2 CON11.2
  Bottom 0.5: CON11.2 51.7,17.65
SDRET3
  Top 0.5: CON13.2 64.4,17.65
  Bottom 0.3: CON14.2 CON13.2
  Bottom 0.5: CON13.2 64.4,17.65
SDRET4
  Top 0.5: CON15.2 77.1,17.65
  Bottom 0.3: CON16.2 CON15.2
  Bottom 0.5: CON15.2 77.1,17.65
SDRET5
  Top 0.5: CON17.2 89.8,17.65
  Bottom 0.3: CON18.2 CON17.2
  Bottom 0.5: CON17.2 89.8,17.65
SDRET6
  Top 0.5: CON19.2 102.5,17.65
  Bottom 0.3: CON20.2 CON19.2
  Bottom 0.5: CON19.2 102.5,17.65
SDRET7
  Top 0.5: CON21.2 115.2,17.65
  Bottom 0.3: CON22.2 CON21.2
  Bottom 0.5: CON21.2 115.2,17.65
VCC  (1 unrouted)
  Top 0.3: 7.22,10.81 CON5.4
  Top 0.5: VLED=VCC.1 7,8.18 | VLED=VCC1.1 121.36,8.18 | CON1.7 13.57,11.3
  Top 1: 7,8.18 7.22,8.4 CON5.4 7.86,11.3 CON1.7 | 121.36,8.18 121.52,8.34 CON3.4
  Bottom 0.5: 13.57,11.3 CON1.7
  Bottom 1: CON2.7 116.29,11.3 116.86,10.73 116.86,9.98 118.21,8.63 120.91,8.63 121.52,9.24 CON3.4
VCC1
  Top 0.4: 14.71,11.3 C1.1 | 14.98,11.38 C1.1 | 14.93,11.08 C1.1
  Top 0.5: CON8.7 14.71,11.3 | U1.16 15.28,17.53 14.63,16.88 14.63,12.98 14.93,12.68 14.93,11.08 | CON7.7 26.3,11.3
  Bottom 0.5: CON7.7 26.3,11.3
  Bottom 1: CON7.7 CON8.7
VCC2
  Top 0.4: 27.41,11.3 C2.1 | 27.68,11.38 C2.1 | 27.63,11.08 C2.1
  Top 0.5: CON10.7 27.41,11.3 | U2.16 27.98,17.53 27.33,16.88 27.33,12.98 27.63,12.68 27.63,11.08 | CON9.7 39,11.3
  Bottom 0.5: CON9.7 39,11.3
  Bottom 1: CON9.7 CON10.7
VCC3
  Top 0.4: 40.11,11.3 C3.1 | 40.38,11.38 C3.1 | 40.33,11.08 C3.1
  Top 0.5: CON12.7 40.11,11.3 | U3.16 40.68,17.53 40.03,16.88 40.03,12.98 40.33,12.68 40.33,11.08 | CON11.7 51.7,11.3
  Bottom 0.5: CON11.7 51.7,11.3
  Bottom 1: CON11.7 CON12.7
VCC4
  Top 0.4: 52.81,11.3 C4.1 | 53.08,11.38 C4.1 | 53.03,11.08 C4.1
  Top 0.5: CON14.7 52.81,11.3 | U4.16 53.38,17.53 52.73,16.88 52.73,12.98 53.03,12.68 53.03,11.08 | CON13.7 64.4,11.3
  Bottom 0.5: CON13.7 64.4,11.3
  Bottom 1: CON13.7 CON14.7
VCC5
  Top 0.4: 65.5,11.3 C5.1 | 65.78,11.38 C5.1 | 65.73,11.08 C5.1
  Top 0.5: CON16.7 65.5,11.3 | U5.16 66.08,17.53 65.43,16.88 65.43,12.98 65.73,12.68 65.73,11.08 | CON15.7 77.1,11.3
  Bottom 0.5: CON15.7 77.1,11.3
  Bottom 1: CON15.7 CON16.7
VCC6
  Top 0.4: 78.2,11.3 C6.1 | 78.48,11.38 C6.1 | 78.43,11.08 C6.1
  Top 0.5: CON18.7 78.2,11.3 | U6.16 78.78,17.53 78.13,16.88 78.13,12.98 78.43,12.68 78.43,11.08 | CON17.7 89.8,11.3
  Bottom 0.5: CON17.7 89.8,11.3
  Bottom 1: CON17.7 CON18.7
VCC7
  Top 0.4: 90.91,11.3 C7.1 | 91.18,11.38 C7.1 | 91.13,11.08 C7.1
  Top 0.5: CON20.7 90.91,11.3 | U7.16 91.48,17.53 90.83,16.88 90.83,12.98 91.13,12.68 91.13,11.08 | CON19.7 102.5,11.3
  Bottom 0.5: CON19.7 102.5,11.3
  Bottom 1: CON19.7 CON20.7
VCC8
  Top 0.4: 103.61,11.3 C8.1 | 103.88,11.38 C8.1 | 103.83,11.08 C8.1
  Top 0.5: CON22.7 103.61,11.3 | U8.16 104.18,17.53 103.53,16.88 103.53,12.98 103.83,12.68 103.83,11.08 | CON21.7 115.2,11.3
  Bottom 0.5: CON21.7 115.2,11.3
  Bottom 1: CON21.7 CON22.7
VLED  (1 unrouted)
  Top 0.3: 4.63,9.28 4.68,9.23
  Top 0.5: VLED=VCC.2 4.9,8.18 | VLED=VCC1.2 119.26,8.18 | 13.57,10.03 CON1.8
  Top 1: 4.9,8.18 4.68,8.4 4.68,9.23 CON6.4 | CON2.8 118.34,10.03 CON4.4 118.98,8.46 119.26,8.18
  Bottom 0.5: CON1.8 13.57,10.03
  Bottom 1: CON1.8 9.62,8.63 5.35,8.63 4.68,9.3 CON6.4
VLED1
  Top 0.5: CON7.8 26.3,10.03
  Bottom 0.5: CON7.8 26.3,10.03
  Bottom 1: CON8.8 18.36,10.03 | 18.36,10.03 CON7.8 | U$5.3 18.68,9.71 18.36,10.03
VLED2
  Top 0.5: CON9.8 39,10.03
  Bottom 0.5: CON9.8 39,10.03
  Bottom 1: CON10.8 31.06,10.03 | 31.06,10.03 CON9.8 | U$8.3 31.38,9.71 31.06,10.03
VLED3
  Top 0.5: CON11.8 51.7,10.03
  Bottom 0.5: CON11.8 51.7,10.03
  Bottom 1: CON12.8 43.76,10.03 | 43.76,10.03 CON11.8 | U$11.3 44.08,9.71 43.76,10.03
VLED4
  Top 0.5: CON13.8 64.4,10.03
  Bottom 0.5: CON13.8 64.4,10.03
  Bottom 1: CON14.8 56.46,10.03 | 56.46,10.03 CON13.8 | U$14.3 56.78,9.71 56.46,10.03
VLED5
  Top 0.5: CON15.8 77.1,10.03
  Bottom 0.5: CON15.8 77.1,10.03
  Bottom 1: CON16.8 69.16,10.03 | 69.16,10.03 CON15.8 | U$17.3 69.48,9.71 69.16,10.03
VLED6
  Top 0.5: CON17.8 89.8,10.03
  Bottom 0.5: CON17.8 89.8,10.03
  Bottom 1: CON18.8 81.86,10.03 | 81.86,10.03 CON17.8 | U$20.3 82.18,9.71 81.86,10.03
VLED7
  Top 0.5: CON19.8 102.5,10.03
  Bottom 0.5: CON19.8 102.5,10.03
  Bottom 1: CON20.8 94.56,10.03 | 94.56,10.03 CON19.8 | U$23.3 94.88,9.71 94.56,10.03
VLED8
  Top 0.5: CON21.8 115.2,10.03
  Bottom 0.5: CON21.8 115.2,10.03
  Bottom 1: CON22.8 107.26,10.03 | 107.26,10.03 CON21.8 | U$26.3 107.58,9.71 107.26,10.03

## Text on the board
tPlace: SDO=SDI | SDO=SDI | naniBox.com | naniBox.com | naniBox.com | naniBox.com | naniBox.com | naniBox.com | naniBox.com | naniBox.com | 77seg_v01 | 77seg_v01 | 77seg_v01 | 77seg_v01 | 77seg_v01 | 77seg_v01 | 77seg_v01 | 77seg_v01 | SDO | !OE | SDO | !OE | SDI | CLK | SDI | CLK | LE | GND | LE | GND | Vled | VCC | Vled | VCC | SDI | SDO | SDI | SDO | SDI | SDO | SDI | SDO | SDI | SDO | SDI | SDO | SDI | SDO | SDI | SDO | VLED=VCC | VLED=VCC
_tNames: R1 | R1 | R1 | R1 | R1 | R1 | R1 | R1 | C1 | U1 | C1 | U1 | C1 | U1 | C1 | U1 | C1 | U1 | C1 | U1 | C1 | U1 | C1 | U1